# Altium PCB Hydroponics_PCB_Layout.PcbDoc
Units mm, origin at the board's own origin, x right, y up, seen from the top; angles counter-clockwise.
Board outline 94.61 x 67.44 mm, 2 copper layers (Top Layer, Bottom Layer); 33 components, 22 nets, 115 pads, 12 vias.
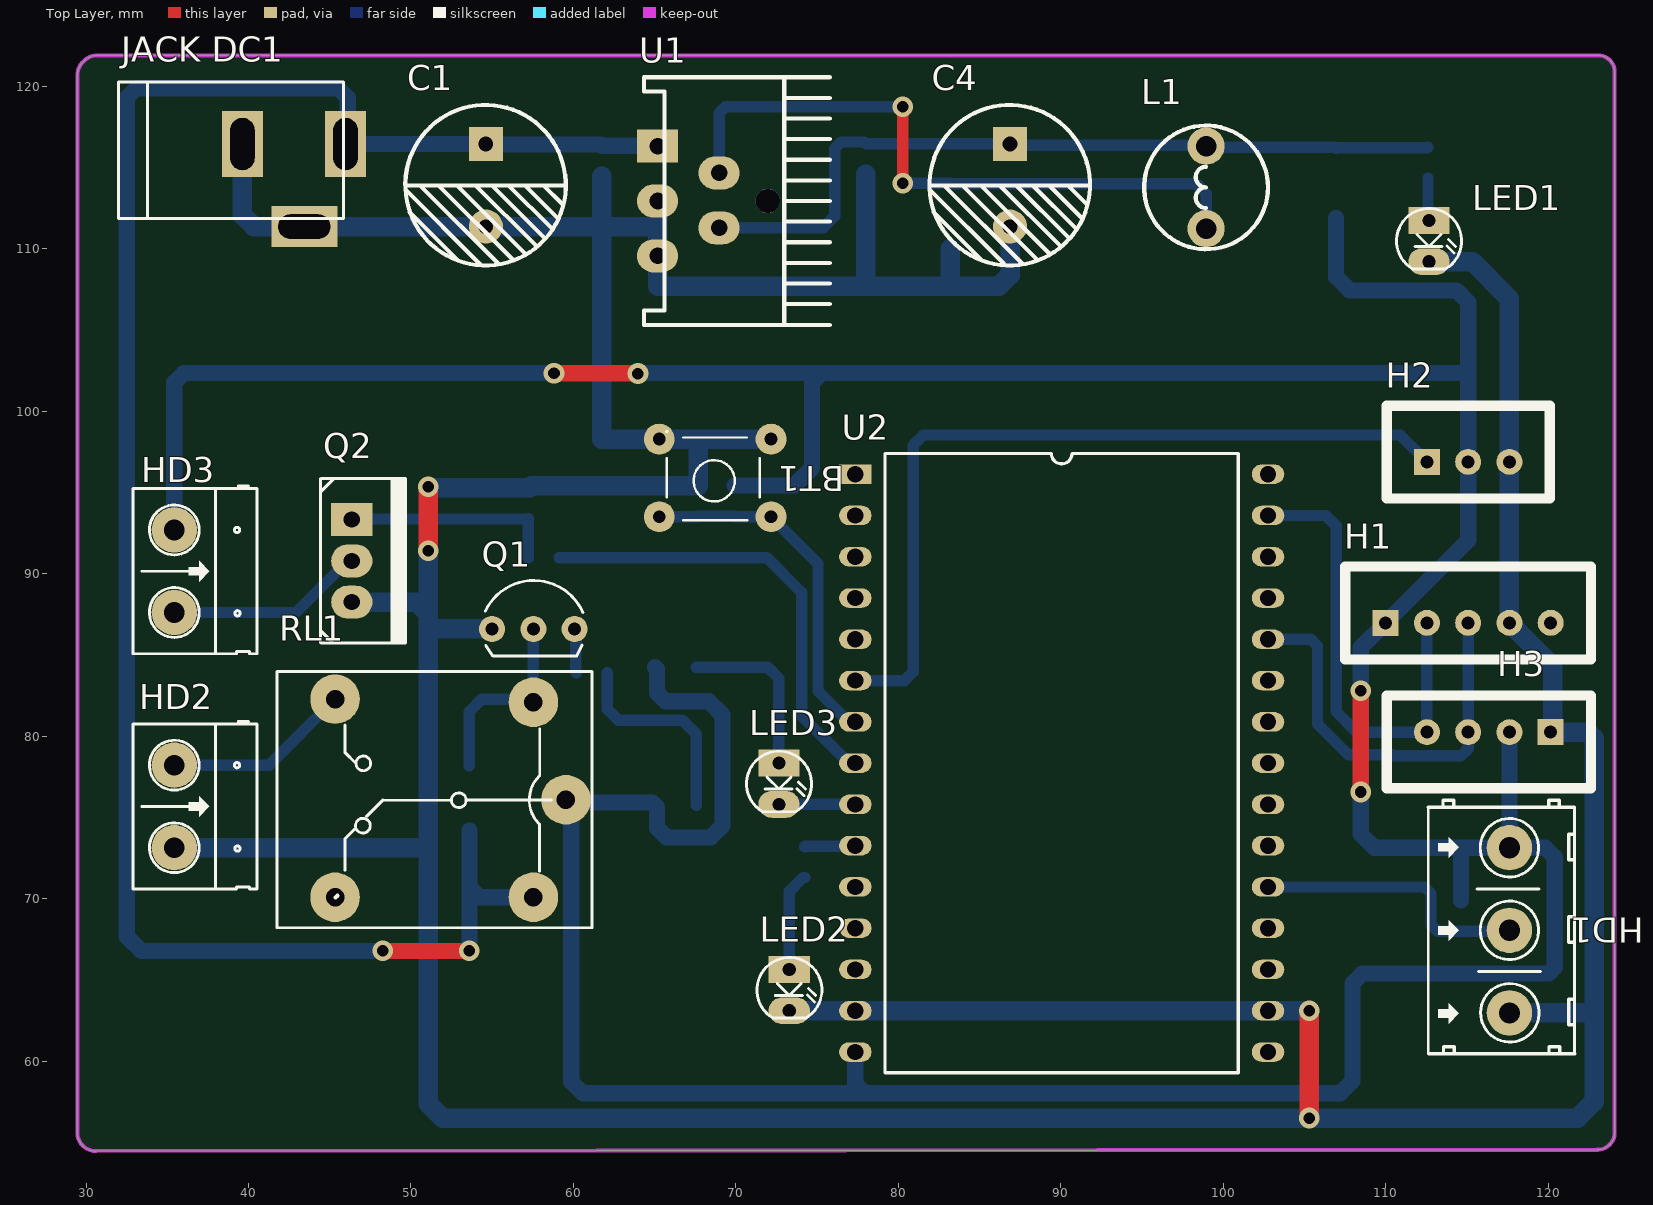
[diagram p0: Top Layer view]
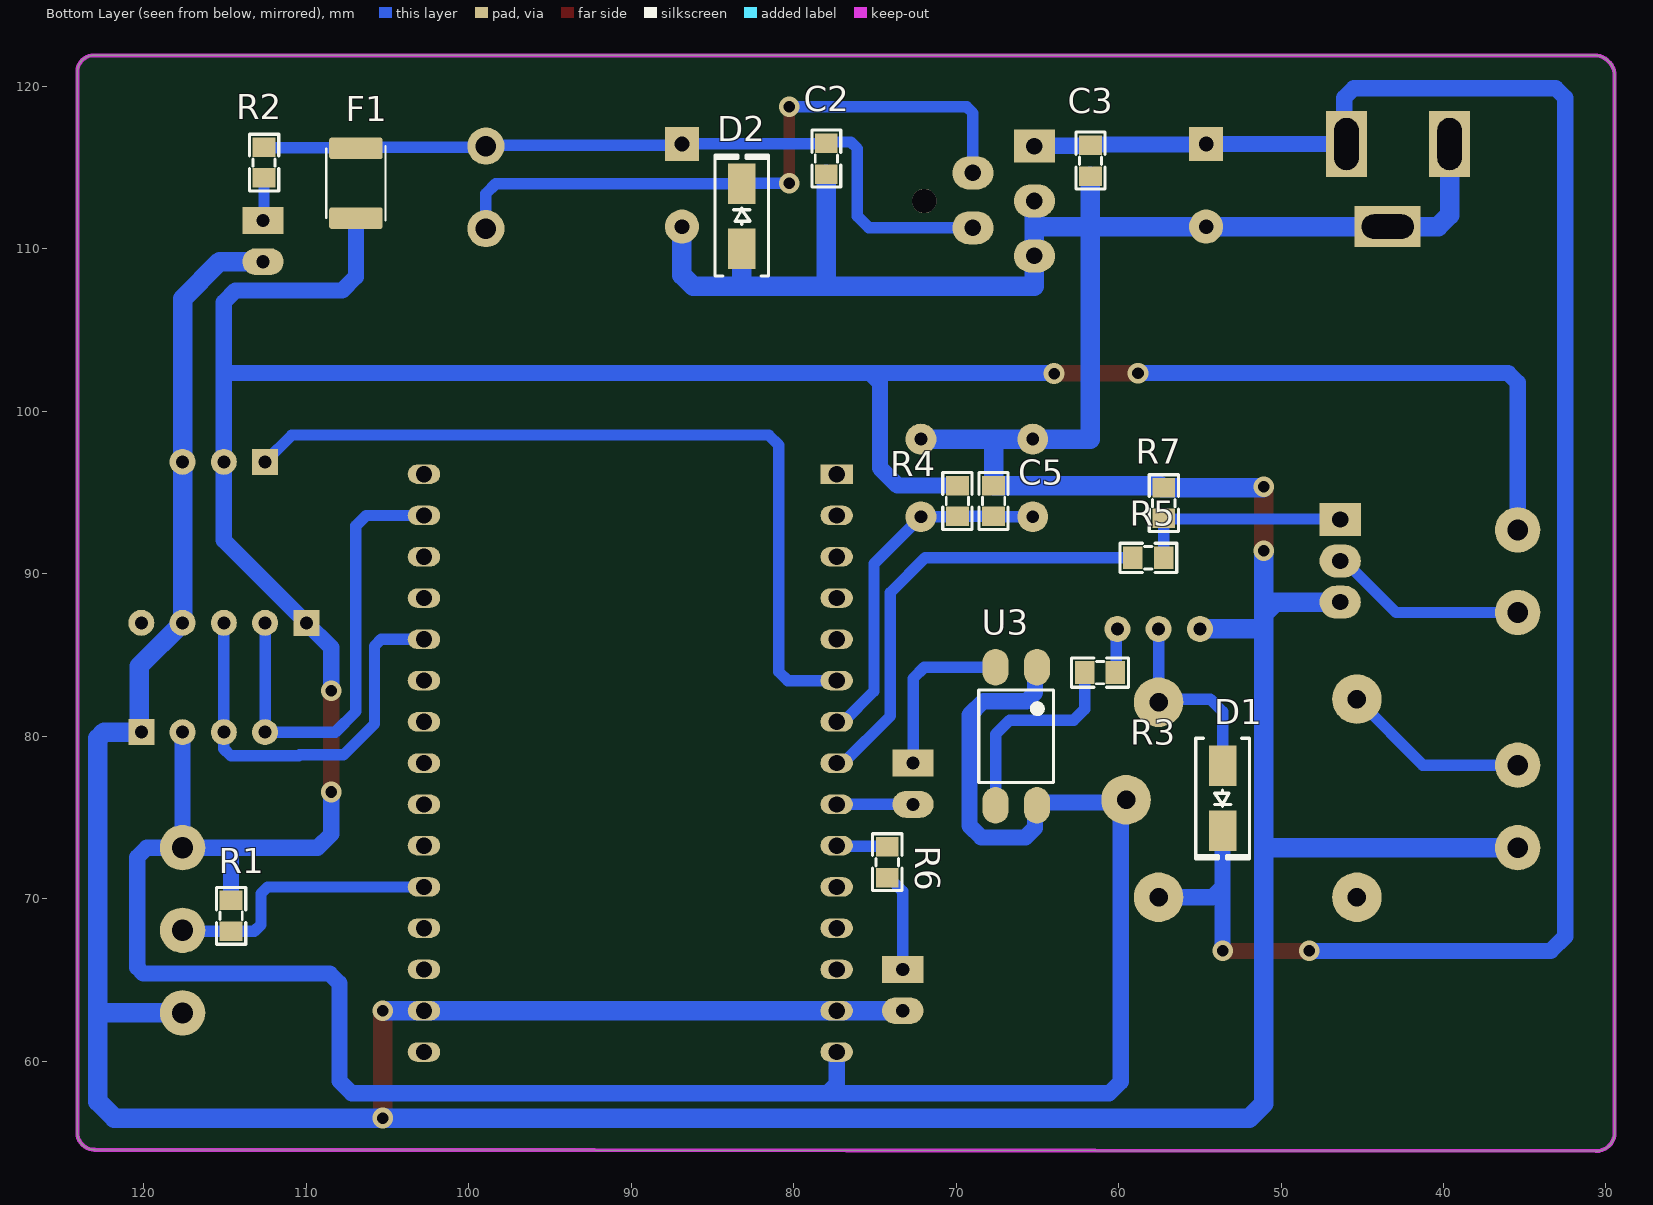
[diagram p1: Bottom Layer view, seen from below]
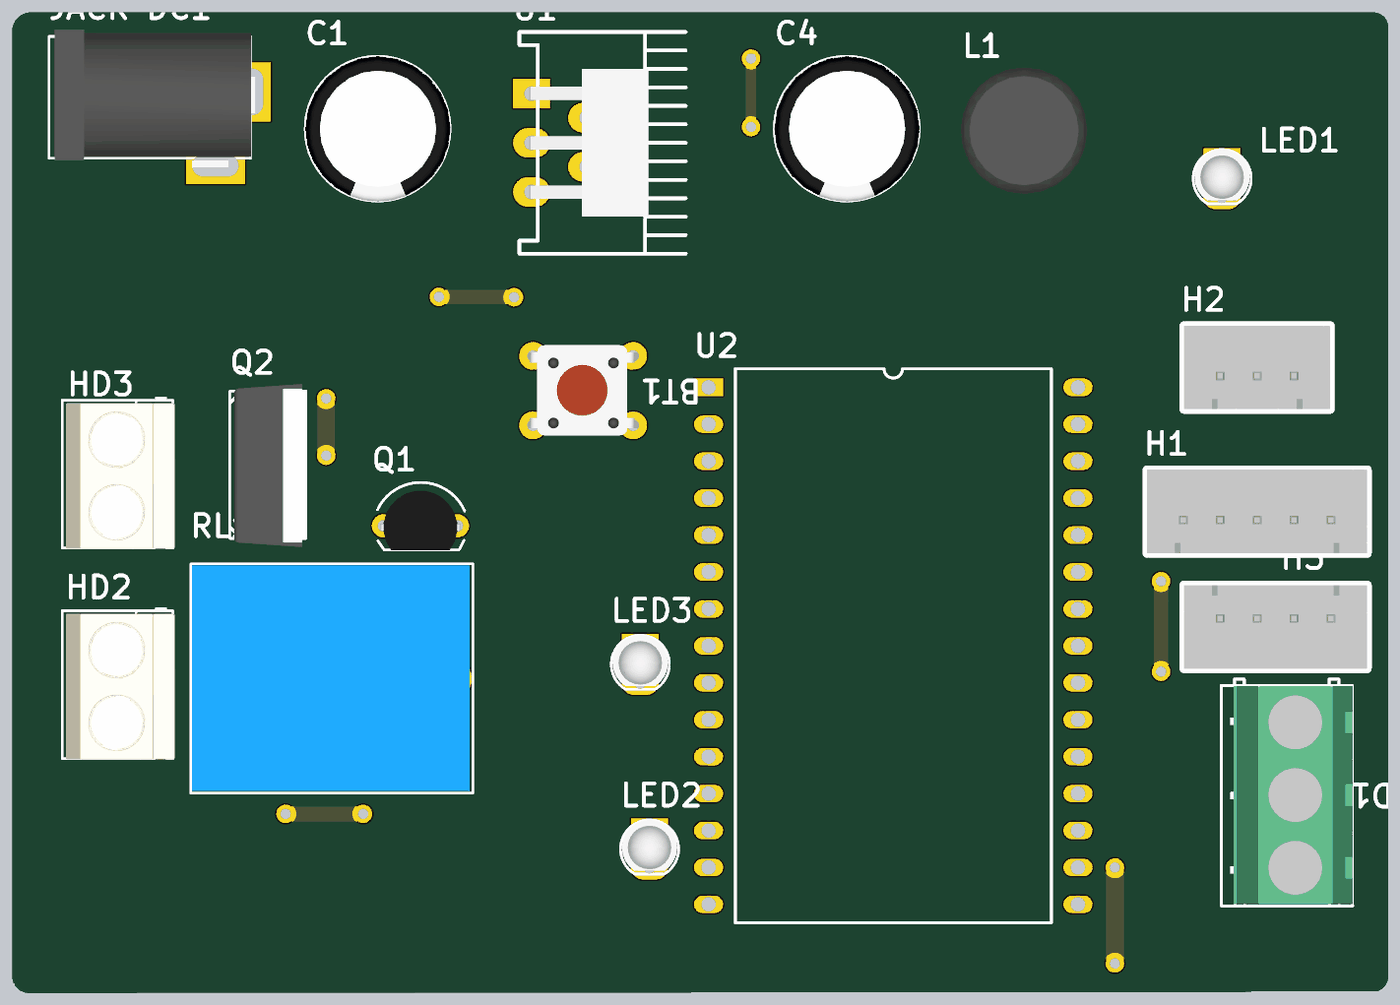
[diagram p2: 3D render of the assembled board from above, using the file's embedded part models]
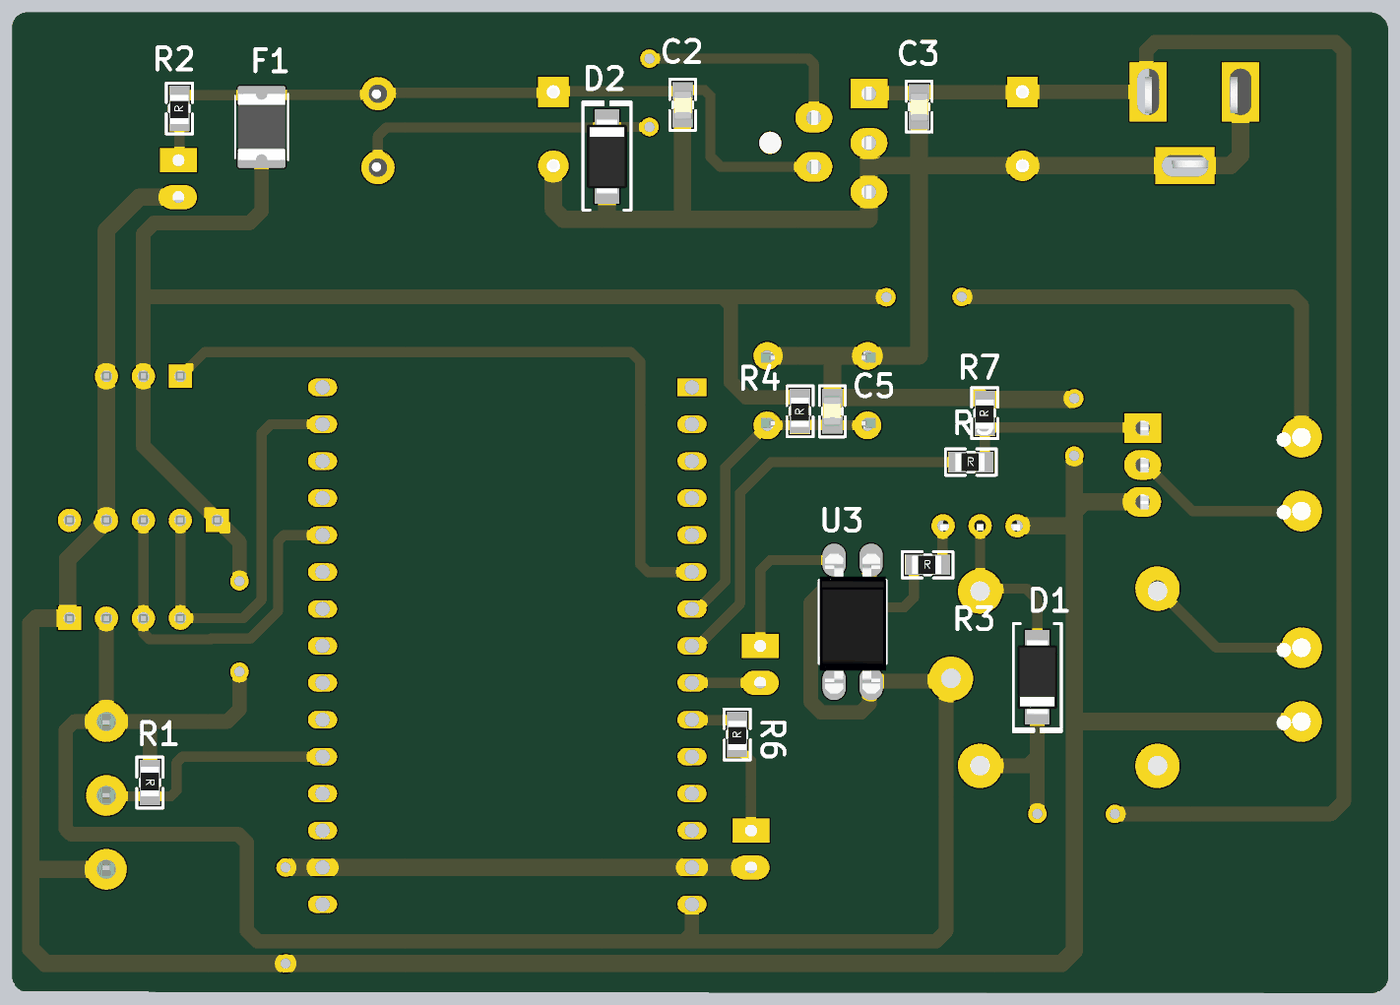
[diagram p3: 3D render of the assembled board from below, using the file's embedded part models]

## Layer stack, top to bottom
Top Solder: solder mask 0.0102, Solder Resist, Dk 3.5
Top Layer: signal copper 0.0356
Dielectric 1: dielectric 0.32, FR-4, Dk 4.8
Bottom Layer: signal copper 0.0356
Bottom Solder: solder mask 0.0102, Solder Resist, Dk 3.5

## Board outline
30.607,54.483 cw(c30.607,55.626) 29.464,55.626 29.464,120.65 cw(c30.734,120.65) 30.734,121.92 123.063,121.92 cw(c123.063,120.904) 124.079,120.904 124.079,55.626 cw(c123.018,55.626) 123.018,54.565

## Design rules (kind name [scope] priority, off if disabled: settings)
Clearance [All] p1: gap=0.31 ignorepadtopadclearanceinfootprint=TRUE except(0.8: Fill-Fill Fill-Poly Fill-Region Poly-Poly Poly-Region Region-Region)
PolygonConnect [All] p1: connectstyle=Relief reliefconductorwidth=0.254 reliefentries=4 polygonreliefangle="90 Angle" airgapwidth=0.254
RoutingVias [All] p1: holewidth=0.711 width=1.27 viastyle="Through Hole" minholewidth=0.711 minwidth=1.27 maxholewidth=0.711 maxwidth=1.27
SolderMaskExpansion [All] p1: expansion=0.102 istentingtop=FALSE
Width 5V [InNet('5V')] p1: maxlimit=1 minlimit=1 preferedwidth=1
Width GND [InNet('GND')] p2: maxlimit=1.2 minlimit=1.2 preferedwidth=1.2
Width 12V [InNet('12V')] p3: maxlimit=1 minlimit=1 preferedwidth=1
Width NET [All] p4: maxlimit=0.7 minlimit=0.7 preferedwidth=0.7
30 further rules are at their usual default settings.

## Components (designator, comment, footprint, x,y, rotation, side; value= is the part's Value field where it differs from the comment)
BT1 "Nut Nhan 4 Chan Cam 6x6" "Nut Nhan 4 Chan Cam 6x6" 71.831,93.32 r180 top
C1 "1000uF" "tu hoa 10mm" 54.61,113.919 r270 top
C2 "104" "Cap 0805" 77.978,115.57 r270 bottom
C3 "104" "Cap 0805" 61.722,115.443 r270 bottom
C4 "1000uF" "tu hoa 10mm" 86.868,113.919 r270 top
C5 "104" "Cap 0805" 67.691,94.488 r90 bottom
D1 "M7" "DIODE SMA" 53.594,76.208 r270 bottom
D2 "SS34" "DIODE SMA" 83.185,112.014 r90 bottom
F1 "2A 24V" "Cau chi tu phuc hoi 2A 24V SMD1812" 106.934,114.046 r270 bottom
H1 "BH1750" XH2.54M-5 109.982,86.995 r0 top
H2 "TDS" XH2.54M-3 112.522,96.901 r0 top
H3 "Header 4P 2.54 Duc Thang" XH2.54M-4 120.142,80.264 r180 top
HD1 "DS18b20" KF127-3P 117.602,73.152 r270 top value="Header 3"
HD2 "Header 2" HED2 35.433,78.232 r270 top
HD3 "Header 2" HED2 35.433,92.71 r270 top
"JACK DC1" "JACK DC 5.5" "JACK DC 5.5" 42.799,113.919 r0 top value="Jac DC"
L1 "100uH 3A" "CUON CAM 100uH3A" 98.933,113.792 r90 top
LED1 "LED" LED-3 112.649,111.76 r270 top value="LED 3 ly Single Colour"
LED2 "LED" LED-3 73.279,65.659 r270 top value="LED 3 ly Single Colour"
LED3 "LED" LED-3 72.644,78.359 r270 top value="LED 3 ly Single Colour"
Q1 "C1815" QTO-92 57.531,86.614 r0 top
Q2 "IRF3709" QTO-220 46.355,93.345 r270 top value=IRF840
R1 "4.7k" "Tro SMD 0805" 114.554,68.961 r270 bottom
R2 "470R" "Tro SMD 0805" 112.649,115.316 r90 bottom
R3 "100R" "Tro SMD 0805" 61.141,83.993 r180 bottom
R4 "10K" "Tro SMD 0805" 69.977,94.488 r90 bottom
R5 "100R" "Tro SMD 0805" 58.166,91.059 r180 bottom
R6 "10k" "Tro SMD 0805" 74.295,72.263 r90 bottom
R7 "10k" "Tro SMD 0805" 57.277,94.361 r90 bottom
RL1 "Relay 10A/12V" RL_SPDT_10A 59.531,76.104 r180 top value="Relay SPDT, 10A, 12V"
U1 "LM2576T-5.0" LM2576t 69.418,112.979 r270 top
U2 "ESP32-CH340 30Pin DevKit" DIP30 77.343,96.139 r0 top
U3 "OPTO PC817 SMD" SOP4 66.294,80.01 r270 bottom value=PC817

## Footprints (in the part's own frame and the unit in brackets; to place one, negate y for a bottom-side part, rotate by r counter-clockwise, add the part's x,y. Pads: shape width x height; smd on the part's side, far side on the other; paste and mask are expansions set on the pad)
"Cap 0805" [mm] "Compoment SMD 80x50mil"
  rect 1.2x1.4 smd: 1(-0.946,-0.003) 2(0.954,-0.003)
  silkscreen extent -1.75,-0.89 1.75,0.89, body extent -0.97,-0.61 1.03,0.64, height 1.23
"Cau chi tu phuc hoi 2A 24V SMD1812" [mm]
  rrect25% 1.34x3.29 smd: 1(-2.15,0) 2(2.15,0)
  silkscreen extent -2.28,-1.82 2.28,1.82, body extent -2.27,-1.62 2.27,1.62, height 1.25
"CUON CAM 100uH3A" [mil] "100uH3A"
  round 90 hole 50: 1(-100,0) 2(100,0)
  silkscreen extent -150,-150 150,150, body extent -171,-175 171,167, height 394
"DIODE SMA" [mm] "SMA"
  rect 2.5x1.7 smd: 1(-2,0) 2(2,0)
  silkscreen extent -3.68,-1.65 3.75,1.65, body extent -2.6,-1.37 2.6,1.37, height 2.4
DIP30 [mm]
  rect 2x1.2 hole 1: 1(0,0)
  oval 2x1.2 hole 1: 2(0,-2.54) 3(0,-5.08) 4(0,-7.62) 5(0,-10.16) 6(0,-12.7) 7(0,-15.24) 8(0,-17.78) 9(0,-20.32) 10(0,-22.86) 11(0,-25.4) 12(0,-27.94) 13(0,-30.48) 14(0,-33.02) 15(0,-35.56) 16(25.4,0) 17(25.4,-2.54) 18(25.4,-5.08) 19(25.4,-7.62) 20(25.4,-10.16) 21(25.4,-12.7) 22(25.4,-15.24) 23(25.4,-17.78) 24(25.4,-20.32) 25(25.4,-22.86) 26(25.4,-25.4) 27(25.4,-27.94) 28(25.4,-30.48) 29(25.4,-33.02) 30(25.4,-35.56)
  silkscreen extent 1.84,-36.83 23.56,1.27
HED2 [mil] "Header 2, 2 pin, hight 300mil, Pin to Pin 200, Colour Green"
  round 110 hole 50: 1(0,0) 2(200,0)
  silkscreen extent -106,-100 300,200, body extent -92,-90 302,205, height 394
"JACK DC 5.5" [mm] "Jac DC input"
  rect 2.54x4.064 hole 1.5 slot 3.2 at 90 deg: 1(3.175,2.54) 2(-3.175,2.54)
  rect 4.064x2.54 hole 1.5 slot 3.2 at 0 deg: 3(0.635,-2.54)
  silkscreen extent -10.79,-2.03 3.05,6.35, body extent -10.42,-2.67 3.4,6.84, height 11.02
KF127-3P [mil] "Header 3, 3 pin, hight 300mil, Pin to Pin 200, Colour Green"
  round 110 hole 51.18: 1(0,0) 2(200,0) 3(400,0)
  silkscreen extent -115,-197 499,158, body extent -96,-164 494,159, height 394
LED-3 [mil] "LED 2 PIN, 3ly Only colour"
  rect 65x100 hole 32: 1(0,0)
  oval 65x100 hole 32: 2(100,0)
  silkscreen extent -29,-78 118,79, body extent -29,-75 109,75, height 256
LM2576t [mil]
  rect 80x100 hole 40: 1(-132,-167.09)
  oval 80x100 hole 40: 2(-67,-18) 3(1,-167) 4(66,-18) 5(134,-167)
  round 59.06 hole 59.06: ""(1,100)
  silkscreen extent -299,-200 301,250, body extent -199,-175 201,150, height 859
"Nut Nhan 4 Chan Cam 6x6" [mil] "SW button 4pin, 250 x250 mil"
  round 75 hole 31: 1(-13,-8) 1(258,-8) 2(-13,-196) 2(258,-196)
  silkscreen extent 15,-215 240,0, body extent -31,-225 281,19, height 276
QTO-92 [mm] "TO-92"
  round 1.6 hole 0.8: 1(-2.54,0) 2(0,0) 3(2.54,0)
  silkscreen extent -2.96,-1.65 3.05,2.99, body extent -2.77,-1.67 2.77,2.41, height 9.78
QTO-220 [mil] "TO-220 - 1-2-3"
  rect 80x100 hole 39: 1(0,0)
  oval 80x100 hole 39: 2(100,0) 3(200,0)
  silkscreen extent -100,-76 300,130, body extent -119,-64 322,121, height 905
RL_SPDT_10A [mil] "Relay SPDT, 5 pin, 10A,W 650mil, L 800mil, H 800mil"
  round 120 hole 45: 1(0,0) 2(559.06,236.22) 3(559.06,-243.78) 4(78.74,-236.22) 5(78.74,236.22)
  silkscreen extent -63,-311 700,310, body extent -55,-306 697,304, height 602
SOP4 [mm]
  oval 2.25x1.6 smd: 1(-4.25,1.27) 2(-4.25,-1.27) 3(4.25,-1.27) 4(4.25,1.27)
  silkscreen extent -2.85,-2.3 2.85,2.3, body extent -4.67,-2.29 4.93,2.31, height 3.6
"Tro SMD 0805" [mm]
  rect 1.2x1.4 smd: 1(-0.946,-0.061) 2(0.954,-0.061)
  silkscreen extent -1.75,-0.97 1.75,0.84, body extent -1.56,-0.76 1.44,0.64, height 0.53
"tu hoa 10mm" [mm]
  rect 2.1x2.1 hole 0.9: 1(-2.54,0)
  round 2.1 hole 0.9: 2(2.54,0)
  silkscreen extent -4.95,-4.96 4.93,4.92, body extent -5,-5 4.97,5, height 20.01
XH2.54M-3 [mm]
  rect 1.6x1.6 hole 0.8: 1(0,0)
  round 1.6 hole 0.8: 2(2.54,0) 3(5.08,0)
  silkscreen extent -2.48,-2.26 7.56,3.46, body extent -2.48,-2.26 7.56,3.48, height 6.91
XH2.54M-4 [mm]
  rect 1.6x1.6 hole 0.8: 1(0,0)
  round 1.6 hole 0.8: 2(2.54,0) 3(5.08,0) 4(7.62,0)
  silkscreen extent -2.48,-2.26 10.1,3.46, body extent -2.48,-2.26 10.1,3.48, height 6.91
XH2.54M-5 [mm]
  rect 1.6x1.6 hole 0.8: 1(0,0)
  round 1.6 hole 0.8: 2(2.54,0) 3(5.08,0) 4(7.62,0) 5(10.16,0)
  silkscreen extent -2.48,-2.26 12.64,3.46, body extent -2.48,-2.26 12.64,3.48, height 6.91

## Part data
BT1: "Nut Nhan 4 Chan 6x6mm", Ma_Hang=MH004584, Ten="Nút Nhấn 4 Chân 6x6x5MM DIP"
C1 C4: library part "Tu Hoa 1000uF 10V 10x12", "Cắm", Chung_Loai=Cắm, Don_Vi=Con, Ma_Hang=MH006614, So_Chan=2, Ten_Linh_Kien="Tụ Hóa 1000uF 10V 10x12MM"
C2 C3 C5: library part "Cap 0805", "Capacitor SMD 0805"
D1: library part "Diode M7 ( 4007 )", "Dán", Chung_Loai=Dán, Don_Vi=Con, Ma_Hang=MH000944, Ten_Linh_Kien="Diode M7 1N4007 SMD 1A 1000V"
D2: library part "Diode SS34 ( 1N5822 )", "Dán", Chung_Loai=Dán, Don_Vi=Con, Ma_Hang=MH002104, Ten_Linh_Kien="Diode SS34 3A 40V SMA ( 1N5822 SS34A)"
F1: library part "Cau chi tu phuc hoi 2A 24V SMD1812", "2A 24V SMD1812", Ma_Hang=MH010033, Ten="Cầu Chì Tự Phục Hồi 2A 24V SMD1812"
H1: library part "Header 5P 2.54 Duc Thang", "Cắm", Chung_Loai=Cắm, Don_Vi=Con, Ma_Hang=MH001298, Ten_Linh_Kien="Header 5P XH2.54-5P Đực Thẳng"
H2: library part "Header 3P 2.54 Duc Thang", "Cắm", Chung_Loai=Cắm, Don_Vi=Con, Ma_Hang=MH001292, Ten_Linh_Kien="Header 3P XH2.54-3P Đực Thẳng"
H3: "Cắm", Chung_Loai=Cắm, Don_Vi=Con, Ma_Hang=MH001285, Ten_Linh_Kien="Header 4P XH2.54-4P Đực Thẳng"
HD1: library part Hed3, "Header 3 (Green)"
HD2 HD3: library part Hed2, "Header 2 (Green)"
L1: library part "CUON CAM 100uH DIP", "Dán", Chung_Loai=Dán, Don_Vi=Con, Ma_Hang=MH002209, Ten_Linh_Kien="Cuộn Cảm 100uH 3A 8x10MM"
LED1 LED2 LED3: "LED Single colour Green and Red"
Q1: "NPN 600mW, ECB"
Q2: library part IRF840, "MOSFET N - CHANNEL 500V - 0.75 - 8A - TO-220"
R1 R2 R3 R4 R5 R6 R7: library part "Tro 0805 5% 470R", "Dán", Chung_Loai=Dán, Don_Vi=Con, Ma_Hang=MH005341, So_Chan=2, Ten_Linh_Kien="Trở 0805 5% 470R"
RL1: library part "Relay 1", "Relay SPDT,10A - 12VDC 5 Pin"
U1: "SIMPLE SWITCHER; 3A Step-Down Voltage Regulator", DigiKeyPartNumber=LM2576T-5.0-ND, Manufacturer="National Semiconductor", PackageTopMarking="NSUZXYTT*LM2576T*-5.0 P+", PowerWise=N, Code_JEDEC=TO-220-AB, ComponentLink1Description="LM2576 Datasheet", ComponentLink1URL=http://www.national.com/ds/LM/LM2576.pdf, ComponentLink2Description="LM2576 Web Page", ComponentLink2URL=http://www.national.com/pf/LM/LM2576.html, ComponentLink3Description="T05A Package Page", ComponentLink3URL=http://www.national.com/packaging/folders/t05a.html, CompType=Switcher, DatasheetVersion=Aug-2004, FirstPublished=4-Dec-2008, PackageDescription="TO-220, Molded, 5 Lead, Straight", PackageReference=T05A, PackageVersion="revJ, Jan-1992", PartNumber=LM2576T-5.0, PinCount=5, Publisher="Altium Limited", RoHS=O
U2: library part Component_1, "ESP32 DevKit V1 (CH340, 30 pins, 3.3V)"
U3: "Single Opto"

## Via types
v1: diameter 1.27, hole 0.711, Top Layer to Bottom Layer, 12 vias

## Nets (pads, with @x,y where several pads share a name; then routed paths per layer and width w, separated by ;. In a path a pad name is that pad's centre, name@x,y a point inside that pad or via, vN(x,y) a via of type N, cw(c..) or ccw(c..) an arc to the next point about the centre after c; other vN are vias at no path point)
5V: F1.2 H1.1 H2.2 H3.2 HD1.1 HD3.1 R1.1 R4.2 RL1.1 U2.15 U3.1 U3.4 | length 290.6
  Top Layer w1: v1(58.801,102.362) 58.814,102.349 63.955,102.349 v1(63.968,102.336) ; v1(108.458,76.581) v1(108.458,82.804)
  Bottom Layer w1: HD3.1@35.09,92.367 HD3.1 35.433,101.776 36.019,102.362 v1(58.801,102.362) ; RL1.1 RL1.1@59.703,75.932 ; v1(63.968,102.336) 63.994,102.362 75.262,102.362 ; U3.1 65.139,84.145 65.139,82.689 65.659,82.169 68.326,82.169 69.174,81.321 69.174,74.508 68.453,73.787 65.725,73.787 65.139,74.373 65.139,75.645 U3.4 64.852,75.932 RL1.1@59.703,75.932 ; R4.2 73.598,95.442 74.676,96.52 74.676,101.776 75.262,102.362 ; U2.15 77.343,58.625 77.929,58.039 ; F1.2 106.934,108.282 107.774,107.442 114.349,107.442 115.062,106.729 115.062,102.362 ; v1(108.458,76.581) 108.458,73.992 109.298,73.152 114.49,73.152 ; v1(108.458,82.804) 108.458,85.471 H1.1 115.062,92.075 H2.2 115.062,102.362 ; R1.1 114.615,73.028 114.49,73.152 ; H3.2 HD1.1 ; RL1.1@59.703,75.932 59.865,75.77 59.865,58.753 60.579,58.039 77.929,58.039 ; 75.262,102.362 115.062,102.362 ; 77.929,58.039 107.188,58.039 107.95,58.801 107.95,64.819 108.536,65.405 120.015,65.405 120.396,65.786 120.396,72.566 119.81,73.152 HD1.1 ; 114.49,73.152 HD1.1
12V: "JACK DC1.1" C1.1 C3.1 D1.2 RL1.5 U1.1 | length 120.9
  Top Layer w1: v1(48.26,66.802) v1(53.594,66.802)
  Bottom Layer w1: v1(48.26,66.802) 33.401,66.802 32.512,67.691 32.512,119.302 33.098,119.888 45.515,119.888 46.101,119.302 46.101,116.586 45.974,116.459 C1.1 54.645,116.424 61.69,116.424 C3.1 61.754,116.36 65.146,116.36 U1.1 ; v1(53.594,66.802) 53.594,70.739 ; D1.2 53.594,70.739 ; RL1.5 54.229,70.104 53.594,70.739
BomMini: LED3.2 U2.9 | length 4.7
  Bottom Layer w0.7: LED3.2 U2.9
DS18B20: HD1.2 R1.2 U2.26 | length 17.2
  Bottom Layer w0.7: U2.26 112.366,70.739 112.776,70.329 112.776,68.417 113.186,68.007 R1.2 117.602,68.007 HD1.2
GND: "JACK DC1.2" "JACK DC1.3" BT1.2 C1.2 C2.2 C3.2 C4.2 C5.2 D2.1 H1.4 H2.3 H3.1 HD1.3 HD2.2 LED1.2 LED2.2 Q1.1 Q2.3 R7.2 U1.3 U1.5 U2.14 U2.29 | length 353.7
  Top Layer w1.2: v1(51.054,91.44) v1(51.054,95.377) ; v1(105.283,56.515) v1(105.283,63.119)
  Bottom Layer w1.2: HD2.2 51.054,73.152 ; 39.624,116.459 39.624,112.082 40.327,111.379 43.434,111.379 C1.2 61.725,111.379 ; Q2.3 50.351,88.265 51.054,87.562 ; v1(51.054,91.44) 51.054,87.562 ; v1(51.054,95.377) 51.073,95.377 51.135,95.315 R7.2 57.316,95.315 57.443,95.442 C5.2 67.688,98.295 67.691,98.298 ; Q1.1 51.054,86.614 ; C3.2 61.725,111.379 ; U1.3 65.176,111.379 ; BT1.2@72.161,98.298 67.691,98.298 ; LED2.2 U2.14 U2.29 v1(105.283,63.119) ; C2.2 77.981,107.696 ; D2.1 83.185,107.696 ; C4.2 86.868,108.399 86.165,107.696 83.185,107.696 ; LED1.2 115.316,109.22 117.602,106.934 H2.3 H1.4 120.269,84.328 120.269,80.391 H3.1 122.428,80.264 122.809,79.883 122.809,62.992 ; HD1.3 122.809,62.992 ; 51.054,73.152 51.054,86.614 ; 51.054,73.152 51.054,57.404 51.943,56.515 v1(105.283,56.515) 121.793,56.515 122.809,57.531 122.809,62.992 ; 51.054,86.614 51.054,87.562 ; 61.725,111.379 65.176,111.379 ; 61.725,111.379 61.725,98.298 65.278,98.298 67.691,98.298 ; 65.176,111.379 U1.5 65.176,107.696 77.981,107.696 ; 77.981,107.696 83.185,107.696
Led: R5.1 U2.8 | length 27.9
  Bottom Layer w0.7: R5.1 71.905,90.998 74.041,88.863 74.041,81.261 76.943,78.359 U2.8
LedTrangThai: R6.2 U2.10 | length 3.1
  Bottom Layer w0.7: R6.2 74.265,73.248 77.312,73.248 U2.10
NetC2_1: C2.1 C4.1 F1.1 L1.2 R2.2 U1.4 | length 48.4
  Bottom Layer w0.7: U1.4 75.362,111.303 76.073,112.014 76.073,116.176 76.483,116.586 77.911,116.586 C2.1 78.01,116.487 86.84,116.487 C4.1 86.931,116.395 98.87,116.395 L1.2 99.001,116.264 106.866,116.264 F1.1 106.971,116.233 112.551,116.233 R2.2
NetD1_1: D1.1 Q1.2 RL1.4 | length 12.2
  Bottom Layer w0.7: D1.1 53.594,81.534 54.356,82.296 57.339,82.296 RL1.4 Q1.2
NetD2_2: D2.2 L1.1 U1.2 | length 40.9
  Top Layer w0.7: v1(80.264,114.046) v1(80.264,118.745)
  Bottom Layer w0.7: U1.2 68.961,118.364 69.342,118.745 v1(80.264,118.745) ; v1(80.264,114.046) 83.153,114.046 D2.2 98.33,114.014 98.933,113.411 L1.1
NetHD2_1: HD2.1 RL1.3 | length 11.6
  Bottom Layer w0.7: HD2.1 41.267,78.232 RL1.3
NetHD3_2: HD3.2 Q2.2 | length 12.2
  Bottom Layer w0.7: HD3.2 42.926,87.63 46.101,90.805 Q2.2
NetLED1_1: LED1.1 R2.1 | length 2.6
  Bottom Layer w0.7: R2.1 112.588,111.821 LED1.1
NetLED2_1: LED2.1 R6.1 | length 6.1
  Bottom Layer w0.7: LED2.1 73.279,70.462 74.134,71.317 R6.1
NetLED3_1: LED3.1 U3.2 | length 10.6
  Bottom Layer w0.7: U3.2 71.95,84.26 72.644,83.566 LED3.1
NetQ1_3: Q1.3 R3.2 | length 2.7
  Bottom Layer w0.7: Q1.3 60.129,86.556 60.129,83.99 R3.2
NetQ2_1: Q2.1 R5.2 R7.1 | length 13.3
  Bottom Layer w0.7: Q2.1 46.39,93.38 57.181,93.38 R7.1@57.214,93.413 ; R5.2 57.214,91 R7.1@57.214,93.413 ; R7.1 R7.1@57.214,93.413
NetR3_1: R3.1 U3.3 | length 12.7
  Bottom Layer w0.7: R3.1 62.087,81.677 62.755,81.009 66.692,81.009 67.564,80.137 U3.3
SCL: H1.2 H3.4 U2.17 | length 28.7
  Bottom Layer w0.7: U2.17 106.299,93.599 106.934,92.964 106.934,81.534 108.204,80.264 H3.4 H1.2
SDA: H1.3 H3.3 U2.20 | length 26
  Bottom Layer w0.7: U2.20 105.381,85.979 105.791,85.569 105.791,80.772 107.696,78.867 110.38,78.867 110.443,78.804 114.618,78.804 115.062,79.248 H3.3 H1.3
TDS: H2.1 U2.6 | length 50.3
  Bottom Layer w0.7: U2.6 80.362,83.439 80.899,83.976 80.899,97.917 81.534,98.552 110.871,98.552 H2.1
Wifi: BT1.1 C5.1 R4.1 U2.7 | length 21.9
  Bottom Layer w0.7: BT1.1@65.278,93.523 65.288,93.533 67.678,93.533 C5.1 R4.1 69.926,93.533 72.152,93.533 72.161,93.523 75.051,90.633 75.051,82.791 76.943,80.899 U2.7
pads on no net: H1.5 RL1.2 U1. U2.1 U2.2 U2.3 U2.4 U2.5 U2.11 U2.12 U2.13 U2.16 U2.18 U2.19 U2.21 U2.22 U2.23 U2.24 U2.25 U2.27 U2.28 U2.30

## Keep-outs
Keep-Out Layer:
  lines w0.254: 29.464,55.626 ccw(c30.607,55.626) 30.607,54.483 123.018,54.565 ccw(c123.018,55.626) 124.079,55.626 124.079,120.904 ccw(c123.063,120.904) 123.063,121.92 31.229,121.92 30.734,121.92 ccw(c30.734,120.65) 29.464,120.65 29.464,56.007 29.464,55.626